# Altium PCB Eye.PcbDoc
Units mm, origin at the board's own origin, x right, y up, seen from the top; angles counter-clockwise.
Board outline 10.19 x 4.98 mm, 2 copper layers (Top Layer, Bottom Layer), stack 1.271 mm thick; 1 components, 0 nets, 8 pads, 2 vias.
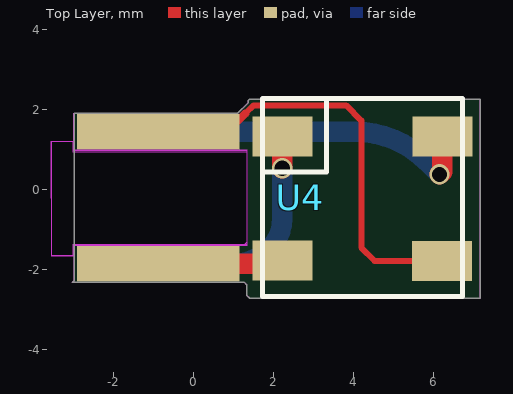
[diagram p0: Top Layer view]
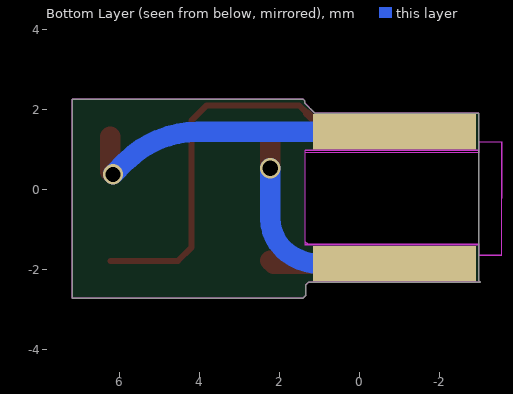
[diagram p1: Bottom Layer view, seen from below]

## Layer stack, top to bottom
Top Solder: solder mask 0.0102, Solder Resist, Dk 3.5
Top Layer: signal copper 0.0356
Dielectric 1: dielectric 1.2, FR-4, Dk 4.8
Bottom Layer: signal copper 0.0356
Bottom Solder: solder mask 0.0102, Solder Resist, Dk 3.5

## Board outline
-2.987,1.908 1.102,1.908 1.364,2.169 1.364,2.225 1.4,2.261 1.651,2.261 7.166,2.261 7.166,-2.716 1.403,-2.716 1.327,-2.64 1.327,-2.376 1.262,-2.311 -3.028,-2.311 -2.988,-2.272
cut-out: -3.56,1.185 -3.56,-1.634 -3.006,-1.634 -2.988,-1.652 -2.988,-1.372 1.275,-1.372 1.346,-1.3 1.346,0.983 -2.991,0.983 -2.991,1.195

## Design rules (kind name [scope] priority, off if disabled: settings)
Clearance [All] p1: gap=0.254
PolygonConnect [All] p1: connectstyle=Relief reliefconductorwidth=0.254 reliefentries=4 polygonreliefangle="90 Angle" airgapwidth=0.254
RoutingVias [All] p1: holewidth=0.711 width=1.27 viastyle="Through Hole" minholewidth=0.711 minwidth=1.27 maxholewidth=0.711 maxwidth=1.27
SolderMaskExpansion [All] p1: expansion=0.102
Width [All] p1: maxlimit=0.254 minlimit=0.254 preferedwidth=0.254
30 further rules are at their usual default settings.

## Components (designator, comment, footprint, x,y, rotation, side; value= is the part's Value field where it differs from the comment)
U4 "RGB50" EYE-BLOCK 3.048,-0.203 r180 top

## Footprints (in the part's own frame and the unit in brackets; to place one, negate y for a bottom-side part, rotate by r counter-clockwise, add the part's x,y. Pads: shape width x height; smd on the part's side, far side on the other; paste and mask are expansions set on the pad)
EYE-BLOCK [mil]
  rect 59.06x39.37 smd: 1(-124.56,62.24) 2(-124.87,-60.24) 3(32.61,-60.24) 4(32.61,61.81)
  rect 160x35 smd: 1(154.87,-65) 4(154.87,65)
  rect 160x35 smd far side: 2(154.87,-65) 3(154.87,65)
  Top Layer lines w6: 68.87,-83 60.87,-91 -30.13,-91 -45.13,-76 -45.13,49 -58.37,62.24 -124.56,62.24 ; -122.13,-23 -125.13,-20
  Top Layer lines w8: 82.5,-69.6 69.1,-83 68.87,-83
  Top Layer lines w20: 96.87,65 35.8,65 32.61,61.81 ; 32.61,-29 32.61,-60.24 ; -122.13,-23 -124.87,-25.74 -124.87,-60.24
  Bottom Layer lines w20: 96.87,65 81.08,65 ccw(c81.08,13.79) 44.88,50.01 ccw(c81.08,13.79) 44.87,50 ccw(c74.47,20.4) 32.61,20.4 32.61,-29 ; 96.87,-65 -38.71,-65 cw(c-38.71,35) -109.42,-35.71 -122.13,-23
  Keep-Out Layer lines w1: 239.2,83 76.58,83 70.3,83 67.75,85.55 67.75,95.93 64.74,98.94 60.66,98.94 -154.13,98.94 -162.13,98.94 -162.13,-97 64.9,-97 66.3,-95.6 66.3,-93.4 76.6,-83.1 237.6,-83.1 ; 238.1,-55.4 238.1,-46.7 67,-46.7 67,46.7 237.7,46.7 237.7,56.7
  silkscreen extent -145,-98 52,97, body extent -152,-97 60,99, height 67

## Via types
v1: diameter 0.508, hole 0.381, Top Layer to Bottom Layer, 2 vias

## Nets (pads, with @x,y where several pads share a name; then routed paths per layer and width w, separated by ;. In a path a pad name is that pad's centre, name@x,y a point inside that pad or via, vN(x,y) a via of type N, cw(c..) or ccw(c..) an arc to the next point about the centre after c; other vN are vias at no path point)
pads on no net: U4.1 U4.2 U4.3 U4.4
copper on no net:
  other v1: 6.15,0.381 2.22,0.533

## Keep-outs
Keep-Out Layer:
  pour cut-out: -3.564,1.199 -3.556,-1.648 -3.002,-1.648 -3.002,-1.372 1.346,-1.372 1.346,0.94 -3.005,0.94 -3.005,1.199
  lines w0.025: -2.991,1.089 -2.991,1.904 -2.987,1.908 ; -2.988,-1.652 -2.988,-2.272 -3.028,-2.311 -2.661,-2.311

## Text inside footprints (layer, text, board x,y; h text height)
U4: Keep-Out Layer "X" at -0.505,0.051 h0.76 r90; Keep-Out Layer "X" at 0.914,0.076 h0.76 r90